# EAGLE board mother (EAGLE 5.06)
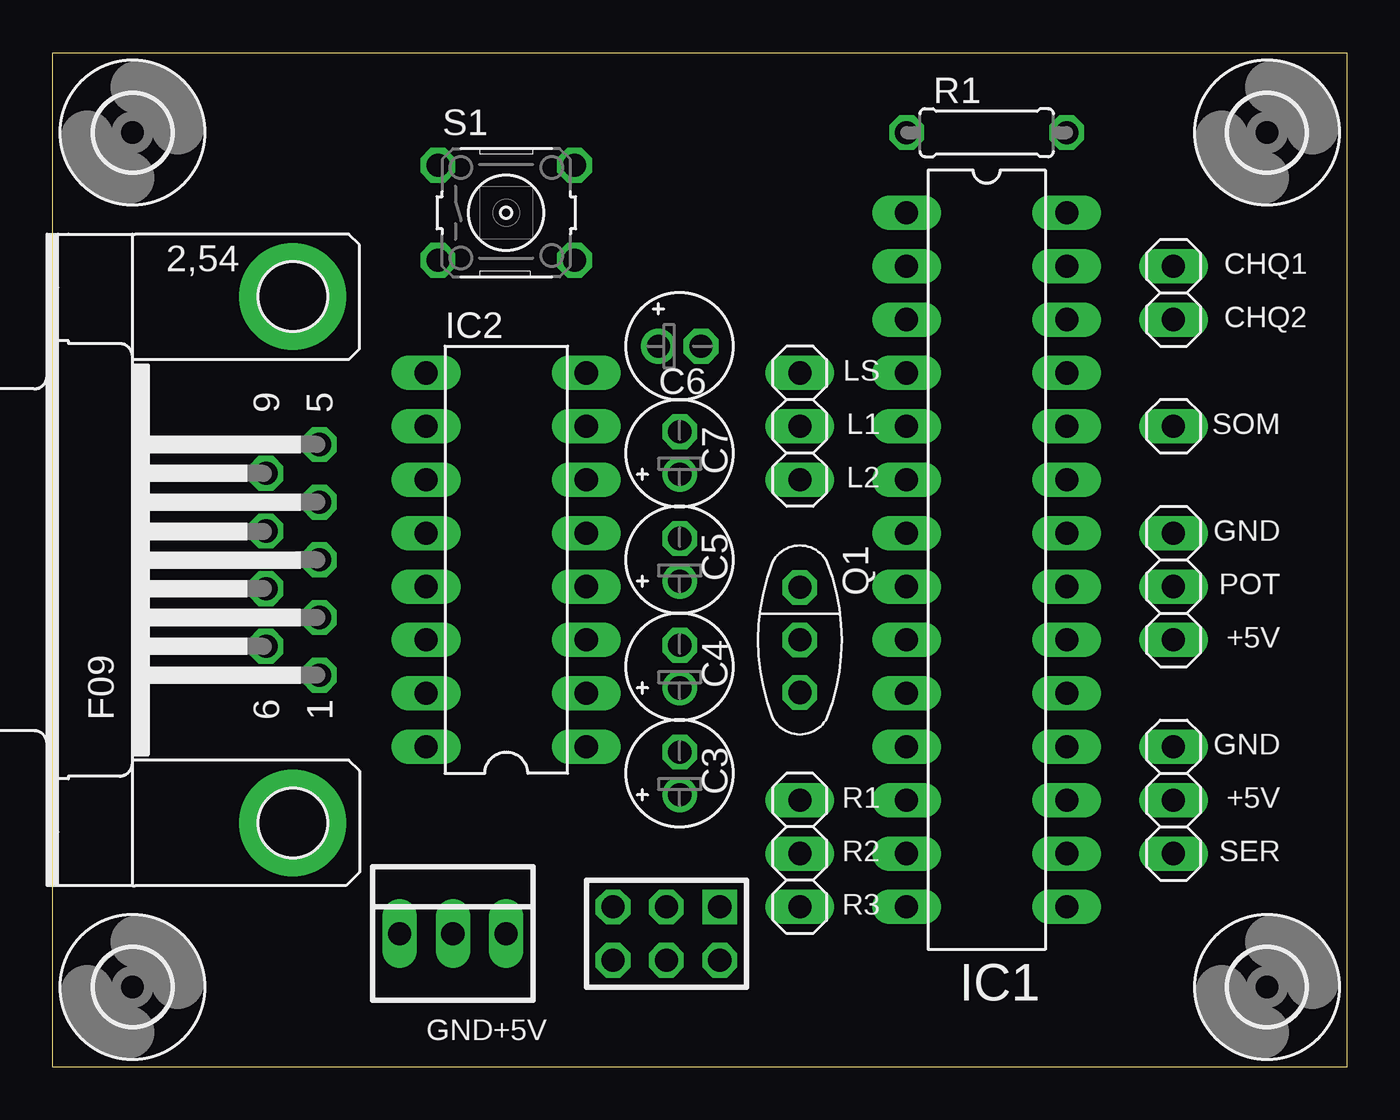
[diagram p0: board, top side]
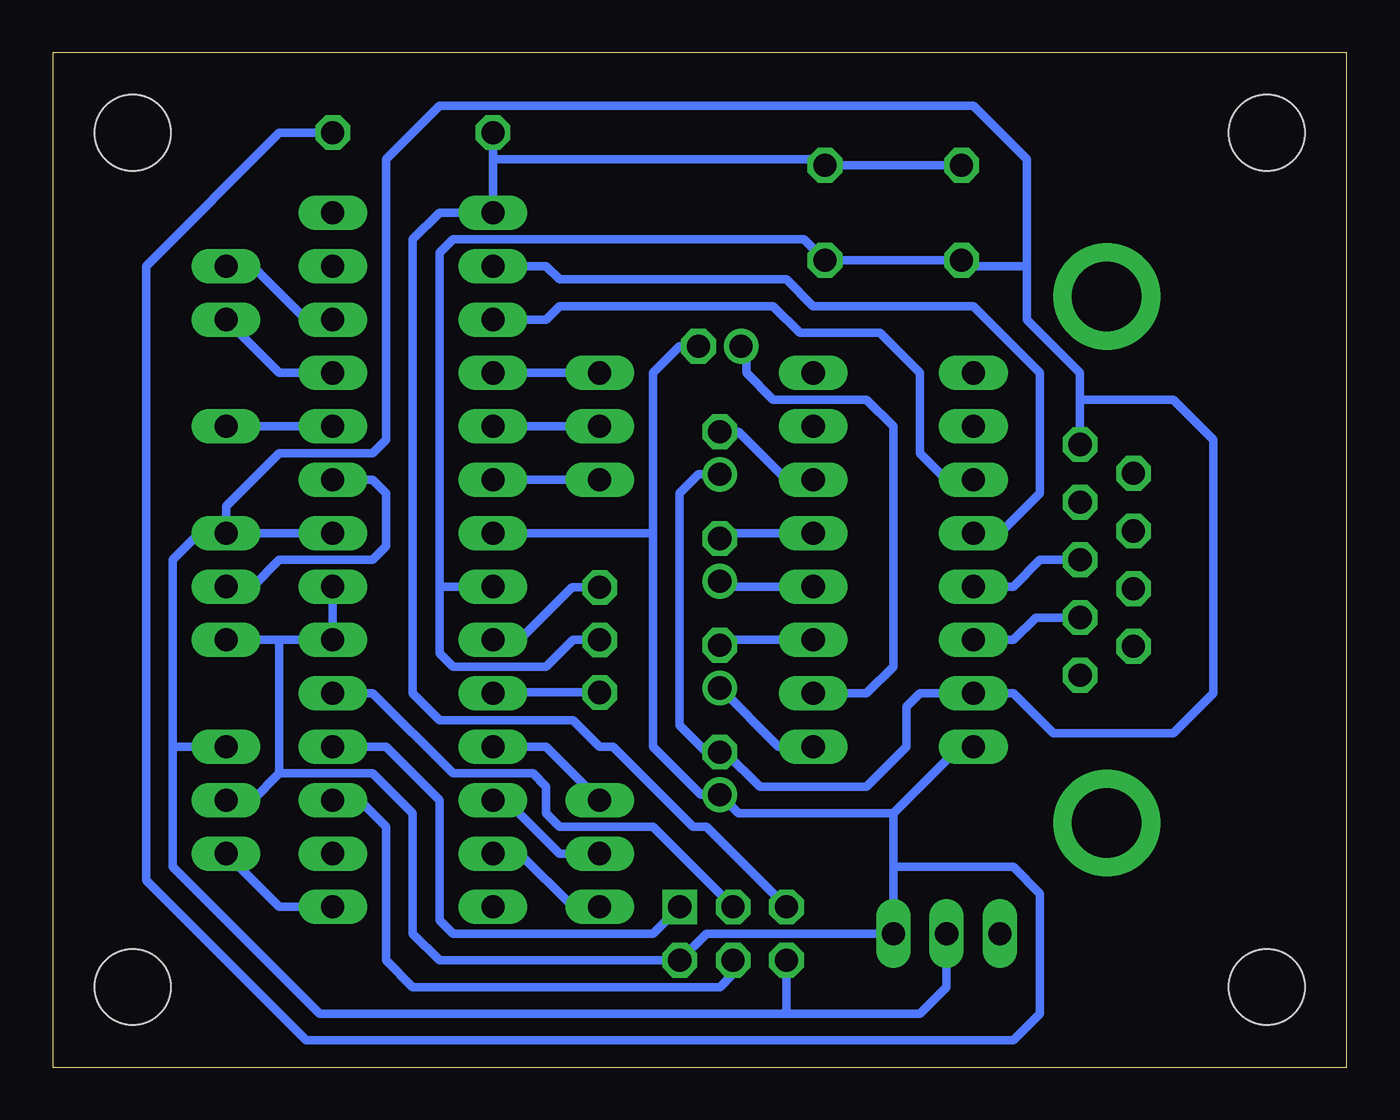
[diagram p1: board, bottom side, seen from below]

Size 61.59 x 48.26 mm. Coordinates in mm from the lower left corner, seen from the top.
Outline: 0,0 0,48.26 61.59,48.26 61.59,0 0,0
Copper layers (1*16): Top 0.035mm / dielectric 1.5mm / Bottom 0.035mm
Design rules "default": minimum track width 10mil, minimum drill 24mil, track to track 8mil, track to pad 8mil, pad to pad 8mil, via to via 8mil, smd to smd 8mil, copper to edge 40mil, drill to drill 8mil, minimum pad ring 10mil, minimum via ring 8mil, stop-mask expansion 4mil, vias tented up to drill 0mil, thermal gap 10mil

## Footprints (pad centres in the part's own frame; a part is rotated, then mirrored left to right if it is on the bottom)
E2-5 = drill 1.1 round: + -1.016,0 | drill 1.1 octagon: - 1.016,0
DIL28-3 = drill 1.1 long: 1 -16.51,-3.81; 2 -13.97,-3.81; 3 -11.43,-3.81; 4 -8.89,-3.81; 5 -6.35,-3.81; 6 -3.81,-3.81; 7 -1.27,-3.81; 8 1.27,-3.81; 9 3.81,-3.81; 10 6.35,-3.81; 11 8.89,-3.81; 12 11.43,-3.81; 13 13.97,-3.81; 14 16.51,-3.81; 15 16.51,3.81; 16 13.97,3.81; 17 11.43,3.81; 18 8.89,3.81; 19 6.35,3.81; 20 3.81,3.81; 21 1.27,3.81; 22 -1.27,3.81; 23 -3.81,3.81; 24 -6.35,3.81; 25 -8.89,3.81; 26 -11.43,3.81; 27 -13.97,3.81; 28 -16.51,3.81
DIL16 = drill 1.1 long: 1 -8.89,-3.81; 2 -6.35,-3.81; 3 -3.81,-3.81; 4 -1.27,-3.81; 5 1.27,-3.81; 6 3.81,-3.81; 7 6.35,-3.81; 8 8.89,-3.81; 9 8.89,3.81; 10 6.35,3.81; 11 3.81,3.81; 12 1.27,3.81; 13 -1.27,3.81; 14 -3.81,3.81; 15 -6.35,3.81; 16 -8.89,3.81
AVR-ISP-6 = drill 1.1 square: 1 -2.54,-1.27 | drill 1.1 octagon: 2 -2.54,1.27; 3 0,-1.27; 4 0,1.27; 5 2.54,-1.27; 6 2.54,1.27
1X03 = drill 1.1 long: 1 -2.54,0; 2 0,0; 3 2.54,0
1X01 = drill 1.1 long: 1 0,0
1X02 = drill 1.1 long: 1 -1.27,0; 2 1.27,0
CSTLS_G9 = drill 1.1 octagon: 1 -2.5,0; 2 0,0; 3 2.5,0
0207/7 = drill 1.1 octagon: 1 -3.81,0; 2 3.81,0
B3F-10XX = drill 1.1 octagon: 1 -3.251,2.261; 2 3.251,2.261; 3 -3.251,-2.261; 4 3.251,-2.261
3,6 = hole 3.6: 0,0
F09HP = drill 1.1 octagon: 1 -5.486,-1.27; 2 -2.743,-1.27; 3 0,-1.27; 4 2.743,-1.27; 5 5.486,-1.27; 6 -4.115,1.27; 7 -1.372,1.27; 8 1.372,1.27; 9 4.115,1.27 | drill 3.302 pad 5.08 round: G1 -12.522,0; G2 12.522,0
22-23-2031 = drill 1.1 long: 1 -2.54,0; 2 0,0; 3 2.54,0

## Placement (x,y rotation side)
C3  1uF  [E2-5]  29.84,13.97 90 top
C4  1uF  [E2-5]  29.84,19.05 90 top
C5  1uF  [E2-5]  29.84,24.13 90 top
C6  1uF  [E2-5]  29.84,34.29 0 top
C7  1uF  [E2-5]  29.84,29.21 90 top
IC1  ATMEGA168  [DIL28-3]  44.45,24.13 270 top
IC2  MAX232  [DIL16]  21.59,24.13 90 top
JP1  AVR-ISP-6  [AVR-ISP-6]  29.21,6.35 180 top
JP2  [1X03]  53.34,22.86 90 top
JP3  [1X03]  35.56,10.16 270 top
JP4  [1X03]  35.56,30.48 270 top
JP5  [1X01]  53.34,30.48 270 top
JP6  [1X03]  53.34,12.7 90 top
JP7  [1X02]  53.34,36.83 90 top
Q1  16.00 MHz  [CSTLS_G9]  35.56,20.32 270 top
R1  10 K  [0207/7]  44.45,44.45 0 top
S1  [B3F-10XX]  21.59,40.64 0 top
U$1  [3,6]  3.81,44.45 0 top
U$2  [3,6]  3.81,3.81 0 top
U$3  [3,6]  57.78,44.45 0 top
U$4  [3,6]  57.78,3.81 0 top
X1  [F09HP]  11.43,24.13 90 top
X2  22-23-2031  [22-23-2031]  19.05,6.35 0 top

## Library data of the parts
C3-C7 IC2 X1 = serial
IC1 JP2-JP7 Q1 R1 S1 U$1-U$4 X2 = caixa
JP1 = ccard

## Nets
#RST: IC1.1 JP1.5 R1.1 S1.1 S1.2
+5V: C3.+ C6.- IC1.7 IC1.20 IC1.21 IC2.16 JP1.2 JP2.1 JP6.2 R1.2 X2.3
+12V: X2.1
CHOQUE_1: IC1.25 JP7.1
CHOQUE_2: IC1.26 JP7.2
GND: C3.- C7.+ IC1.8 IC1.22 IC2.15 JP1.6 JP2.3 JP6.3 Q1.2 S1.3 S1.4 X1.5 X2.2
LDR_LED1: IC1.5 JP4.2
LDR_LED2: IC1.6 JP4.3
LDR_SENSOR: IC1.4 JP4.1
N$1: C4.+ IC2.1
N$2: IC1.19 JP1.3
N$3: IC1.18 JP1.1
N$4: IC1.17 JP1.4
N$5: IC1.10 Q1.3
N$6: IC1.9 Q1.1
N$23: C4.- IC2.3
N$24: C5.+ IC2.4
N$26: C5.- IC2.5
N$27: C6.+ IC2.2
N$28: C7.- IC2.6
N$29: IC2.14 X1.2
N$30: IC2.13 X1.3
POT: IC1.23 JP2.2
RELE_1: IC1.11 JP3.1
RELE_2: IC1.12 JP3.2
RELE_3: IC1.13 JP3.3
RXD: IC1.2 IC2.12
SERVO: IC1.15 JP6.1
SOM: IC1.24 JP5.1
TXD: IC1.3 IC2.11

## Tracks (layer width: path | path; a pad name or v marks a point on that pad's centre or on a via)
#RST
  Bottom 0.406: 40.64,43.18 IC1.1 43.18,40.64 44.45,39.37 44.45,17.78 43.18,16.51 36.83,16.51 35.56,15.24 34.92,15.24 31.11,11.43 30.48,11.43 JP1.5 | 40.64,43.18 R1.1 | 40.64,43.18 25.12,43.18 S1.2 S1.1
+5V
  Bottom 0.406: IC2.16 18.41,15.24 21.59,12.06 | 21.59,12.06 28.96,12.06 C3.+ 30.73,12.95 33.02,15.24 33.02,25.4 | 21.59,9.53 X2.3 30.48,6.35 JP1.2 43.18,5.08 44.45,6.35 44.45,12.06 46.35,13.97 50.8,13.97 | 21.59,9.53 21.59,12.06 | 33.02,25.4 IC1.7 | 33.02,25.4 33.02,33.02 31.75,34.29 C6.- | JP6.2 52.07,12.7 50.8,13.97 | IC1.21 IC1.20 50.8,20.32 | 50.8,20.32 JP2.1 | 50.8,13.97 50.8,20.32 | R1.2 50.8,44.45 57.15,38.1 57.15,8.89 49.53,1.27 15.88,1.27 14.61,2.54 14.61,8.26 15.88,9.53 21.59,9.53
CHOQUE_1
  Bottom 0.406: IC1.25 50.8,33.02 JP7.1
CHOQUE_2
  Bottom 0.406: IC1.26 49.53,35.56 52.07,38.1 JP7.2
GND
  Bottom 0.406: 12.7,31.75 X1.5 | C7.+ 30.86,28.19 31.75,27.3 31.75,16.26 30.48,14.99 C3.- 29.59,14.99 27.94,13.34 22.86,13.34 20.95,15.24 20.95,17.14 20.32,17.78 IC2.15 15.88,17.78 13.97,15.88 8.26,15.88 6.35,17.78 6.35,29.84 8.26,31.75 12.7,31.75 | Q1.2 36.83,20.32 38.1,19.05 42.55,19.05 43.18,19.68 43.18,22.86 | 43.18,22.86 43.18,38.73 42.55,39.37 25.83,39.37 S1.4 S1.3 18.06,38.1 15.24,38.1 | 43.18,22.86 IC1.8 | 26.67,2.54 JP1.6 | 15.24,38.1 15.24,43.18 17.78,45.72 43.18,45.72 45.72,43.18 45.72,29.84 46.35,29.21 50.8,29.21 53.34,26.67 JP2.3 | 15.24,38.1 15.24,35.56 12.7,33.02 12.7,31.75 | JP2.3 IC1.22 | JP2.3 54.61,25.4 55.88,24.13 55.88,15.24 | 55.88,15.24 JP6.3 | 55.88,15.24 55.88,9.53 48.9,2.54 26.67,2.54 | 26.67,2.54 20.32,2.54 19.05,3.81 X2.2
LDR_LED1
  Bottom 0.406: JP4.2 IC1.5
LDR_LED2
  Bottom 0.406: JP4.3 IC1.6
LDR_SENSOR
  Bottom 0.406: JP4.1 IC1.4
N$1
  Bottom 0.406: IC2.1 27.05,15.24 C4.+
N$2
  Bottom 0.406: IC1.19 46.35,17.78 42.55,13.97 38.73,13.97 38.1,13.34 38.1,12.06 37.47,11.43 33.02,11.43 JP1.3
N$3
  Bottom 0.406: JP1.1 33.02,6.35 42.55,6.35 43.18,6.99 43.18,12.7 45.72,15.24 IC1.18
N$4
  Bottom 0.406: JP1.4 29.21,4.45 29.84,3.81 44.45,3.81 45.72,5.08 45.72,11.43 46.99,12.7 IC1.17
N$5
  Bottom 0.406: Q1.3 40.6,17.82 IC1.10
N$6
  Bottom 0.406: Q1.1 36.87,22.82 39.37,20.32 IC1.9
N$23
  Bottom 0.406: IC2.3 29.59,20.32 C4.-
N$24
  Bottom 0.406: IC2.4 29.59,22.86 C5.+
N$26
  Bottom 0.406: IC2.5 29.59,25.4 C5.-
N$27
  Bottom 0.406: IC2.2 22.86,17.78 21.59,19.05 21.59,30.48 22.86,31.75 27.3,31.75 28.57,33.02 28.57,34.04 C6.+
N$28
  Bottom 0.406: IC2.6 26.67,27.94 28.96,30.23 C7.-
N$29
  Bottom 0.406: X1.2 14.81,21.39 15.88,20.32 IC2.14
N$30
  Bottom 0.406: X1.3 14.61,24.13 15.88,22.86 IC2.13
POT
  Bottom 0.406: JP2.2 52.07,22.86 50.8,24.13 46.35,24.13 45.72,24.77 45.72,27.3 46.35,27.94 IC1.23
RELE_1
  Bottom 0.406: JP3.1 38.1,15.24 IC1.11
RELE_2
  Bottom 0.406: JP3.2 37.47,10.16 40.01,12.7 IC1.12
RELE_3
  Bottom 0.406: JP3.3 36.83,7.62 39.37,10.16 IC1.13
RXD
  Bottom 0.406: IC1.2 38.1,38.1 37.47,37.47 26.67,37.47 25.4,36.2 17.78,36.2 14.61,33.02 14.61,27.3 16.51,25.4 IC2.12
SERVO
  Bottom 0.406: IC1.15 50.8,7.62 JP6.1
SOM
  Bottom 0.406: IC1.24 JP5.1
TXD
  Bottom 0.406: IC2.11 19.05,27.94 20.32,29.21 20.32,33.02 22.23,34.92 26.04,34.92 27.3,36.2 37.47,36.2 38.1,35.56 IC1.3

## Text on the board
tNames: CHQ1 | CHQ2 | LS | L1 | SOM | L2 | GND | POT | +5V | GND | R1 | +5V | R2 | SER | R3 | GND | +5V